# Altium PCB idro900ma.PcbDoc
Units mm, origin at the board's own origin, x right, y up, seen from the top; angles counter-clockwise.
Board outline 152.4 x 101.6 mm, 2 copper layers (Top Layer, Bottom Layer); 21 components, 17 nets, 93 pads, 11 vias.
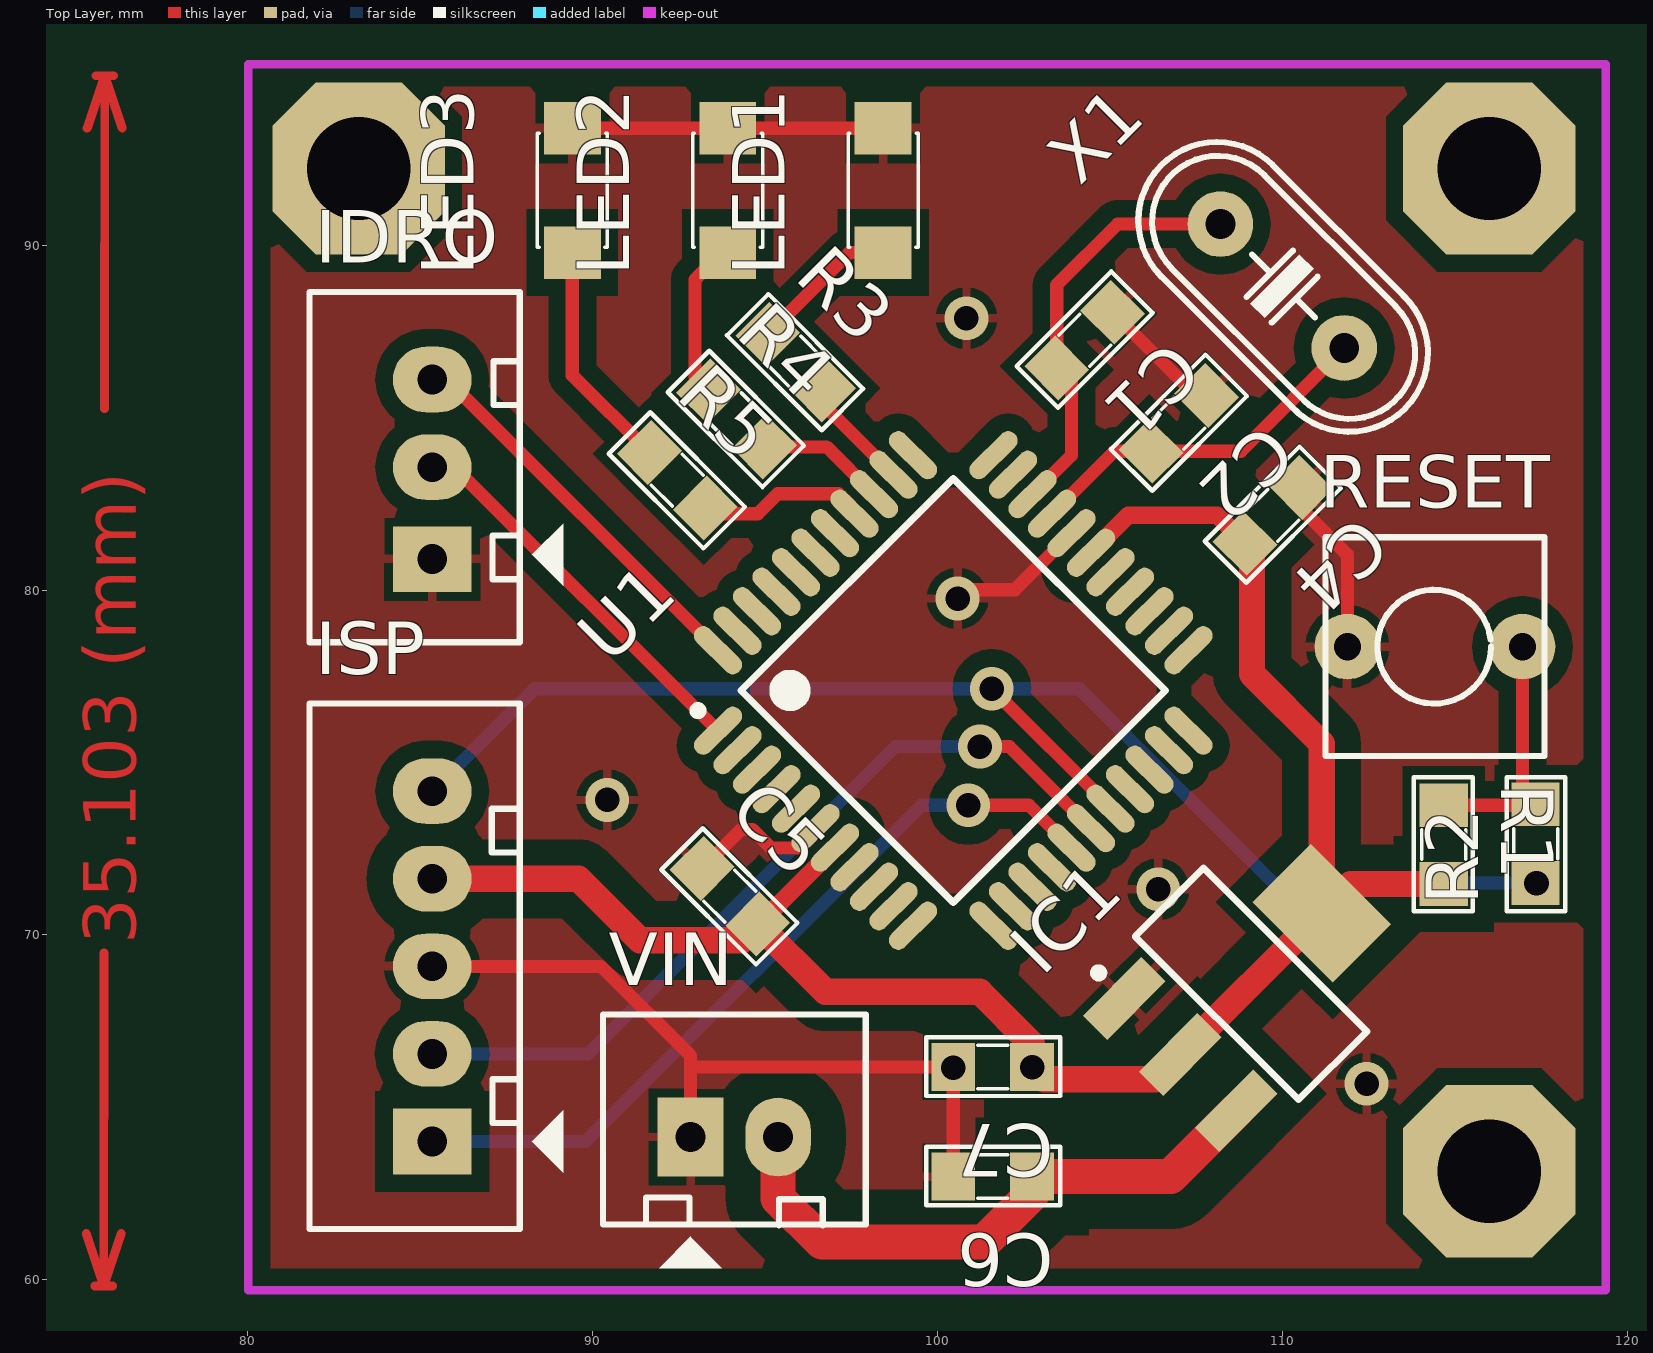
[diagram p0: Top Layer view]
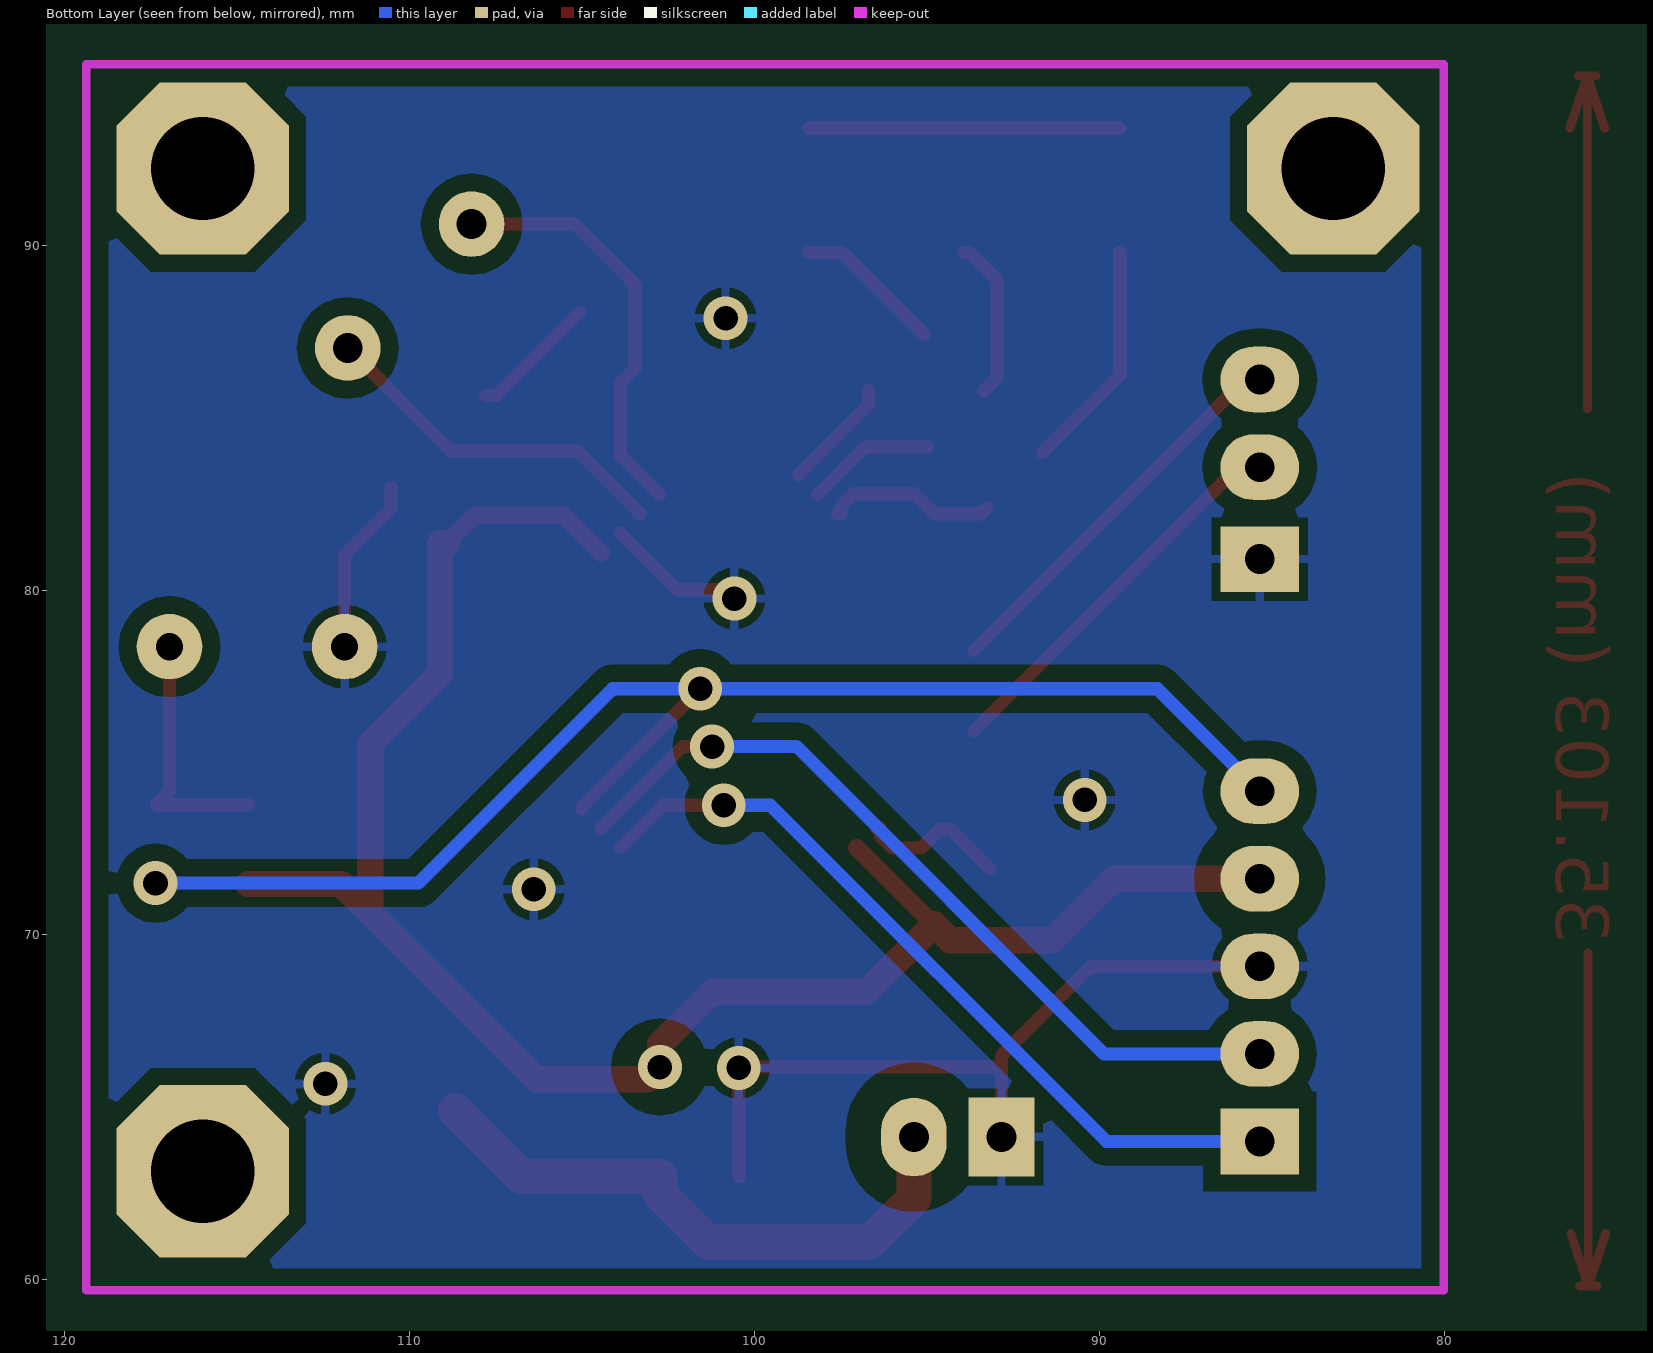
[diagram p1: Bottom Layer view, seen from below]
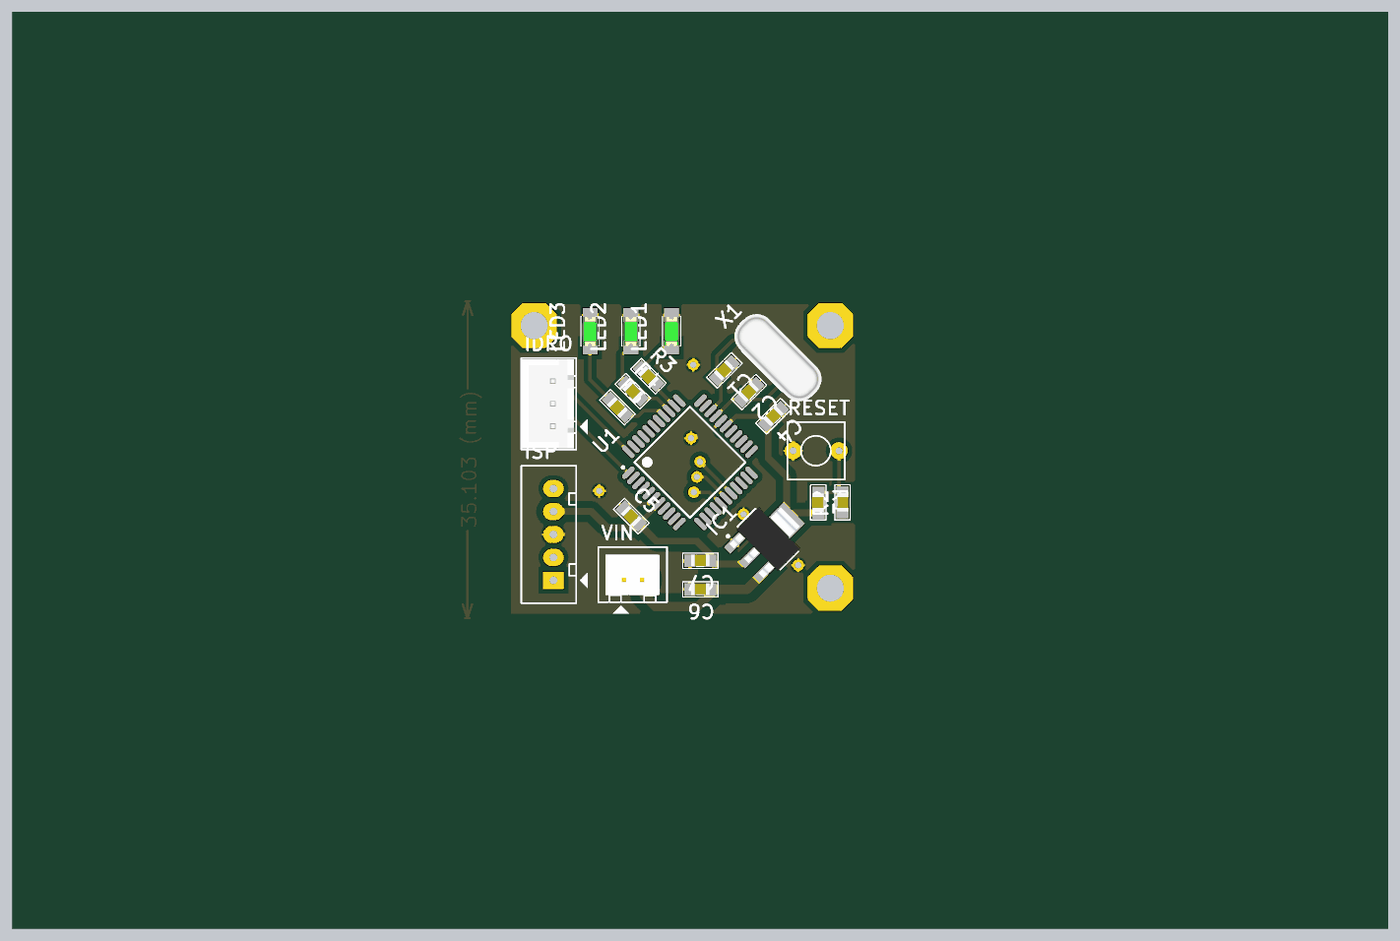
[diagram p2: 3D render of the assembled board from above, using the file's embedded part models]

## Layer stack, top to bottom
Top Solder: solder mask 0.0102, Solder Resist, Dk 3.5
Top Layer: signal copper 0.0356
Dielectric 1: dielectric 0.32, FR-4, Dk 4.8
Bottom Layer: signal copper 0.0356
Bottom Solder: solder mask 0.0102, Solder Resist, Dk 3.5

## Board outline
25.4,25.4 177.8,25.4 177.8,127 25.4,127

## Design rules (kind name [scope] priority, off if disabled: settings)
Clearance COUT [InNet('VCC-3.3V')] p1: gap=0.762
Clearance CIN [InNet('IN')] p2: gap=1.016
Clearance [All] p3: gap=0.508
PolygonConnect [All] p1: connectstyle=Relief reliefconductorwidth=0.254 reliefentries=4 polygonreliefangle="90 Angle" airgapwidth=0.254
RoutingVias [All] p1: holewidth=0.711 width=1.27 viastyle="Through Hole" minholewidth=0.711 minwidth=1.27 maxholewidth=0.711 maxwidth=1.27
SolderMaskExpansion [All] p1: expansion=0.102
UnpouredPolygon [All] p1: allowunpoured=FALSE
Width OUT [InNet('VCC-3.3V')] p1: maxlimit=0.762 minlimit=0.508 preferedwidth=0.762
Width IN [InNet('IN')] p2: maxlimit=1.016 minlimit=1.016 preferedwidth=1.016
Width [All] p3: maxlimit=0.381 minlimit=0.381 preferedwidth=0.381
29 further rules are at their usual default settings.

## Components (designator, comment, footprint, x,y, rotation, side; value= is the part's Value field where it differs from the comment)
C1 "22pF" SM-0805 104.267,87.249 r225 top
C2 "2pF" SM-0805 106.998,84.836 r225 top
C4 "103" SM-0805 109.728,82.169 r225 top
C5 "103" SM-0805 93.98,71.12 r315 top
C6 "1uF/450V" SM-0805 101.6,62.992 r180 top
C7 "1uF/450V" SM-0805 101.6,66.167 r180 top
IC1 "LM1117" SOT223-4N 109.093,68.58 r45 top
IDRO "JP3" CON3 85.344,81.026 r90 top
ISP "JP5" CON5 85.344,64.008 r90 top
LED1 "LED" LED1206-Green 98.425,89.789 r90 top
LED2 "LED" LED1206-Green 93.916,89.789 r90 top
LED3 "LED" LED1206-Green 89.408,89.789 r90 top
R1 "4.7k" SM-0805 114.681,72.619 r270 top
R2 "330" SM-0805 117.348,72.644 r90 top
R3 "220" SM-0805 95.885,86.614 r315 top
R4 "220" SM-0805 94.17,84.963 r315 top
R5 "220" SM-0805 92.456,83.185 r315 top
RESET "SW" SW2 111.887,78.359 r0 top
U1 "PIC18F46K20-I/PT" TQFP-PT44_N 100.457,77.089 r45 top
VIN "JP2" CON2 92.837,64.135 r0 top
X1 "4Mhz" XT2 110.001,88.819 r135 top

## Footprints (in the part's own frame and the unit in brackets; to place one, negate y for a bottom-side part, rotate by r counter-clockwise, add the part's x,y. Pads: shape width x height; smd on the part's side, far side on the other; paste and mask are expansions set on the pad)
CON2 [mil] "CON2"
  rect 75x90 hole 34: 1(0,0)
  oval 75x90 hole 34: 2(100,0)
  silkscreen extent -100,-150 200,140, body extent -68,-70 168,107, height 236
CON3 [mil] "CON 3"
  rect 75x90 hole 34: 1(-5,0)
  oval 75x90 hole 34: 2(100,0) 3(200,0)
  silkscreen extent -100,-150 300,140, body extent -95,-90 295,136, height 276
CON5 [mil] "CON5"
  rect 75x90 hole 34: 1(0,0)
  oval 75x90 hole 34: 2(100,0) 3(200,0) 4(300,0) 5(400,0)
  silkscreen extent -100,-150 500,140
LED1206-Green [mil]
  rect 60x65 smd: 1(0,0) 2(142,0)
  silkscreen extent 6,-40 136,40, body extent 7,-31 133,32, height 43
SM-0805 [mil] "Compoment SMD 80x50mil"
  rect 50x55 smd: 1(-45,0) 2(45,0)
  silkscreen extent -77,-34 76,33, body extent -40,-27 40,23, height 24
SOT223-4N [mm] "SOT223, 4-Leads, Body 6.5x3.5mm, Pitch 2.3mm, Lead Span 7mm, IPC Medium Density"
  rect 2.4x1 smd: 1(-2.9,2.3) 2(-2.9,0) 3(-2.9,-2.3)
  rect 2.4x3.3 smd: 4(2.9,0)
  silkscreen extent -3.02,-3.35 1.4,3.47, body extent -3.39,-3.27 3.5,3.23, height 1.72
SW2 [mil] "SW button 2pin, 250x 250 mil"
  round 75 hole 31: 1(0,0) 2(200,0)
  silkscreen extent -25,-125 225,125
TQFP-PT44_N [mm] "Thin QFP, 44-Leads, Body 10x10mm, Pitch 0.8mm, IPC Medium Density"
  oval 1.75x0.55 smd: 1(-5.65,4) 2(-5.65,3.2) 3(-5.65,2.4) 4(-5.65,1.6) 5(-5.65,0.8) 6(-5.65,0) 7(-5.65,-0.8) 8(-5.65,-1.6) 9(-5.65,-2.4) 10(-5.65,-3.2) 11(-5.65,-4) 23(5.65,-4) 24(5.65,-3.2) 25(5.65,-2.4) 26(5.65,-1.6) 27(5.65,-0.8) 28(5.65,0) 29(5.65,0.8) 30(5.65,1.6) 31(5.65,2.4) 32(5.65,3.2) 33(5.65,4)
  oval 0.55x1.75 smd: 12(-4,-5.65) 13(-3.2,-5.65) 14(-2.4,-5.65) 15(-1.6,-5.65) 16(-0.8,-5.65) 17(0,-5.65) 18(0.8,-5.65) 19(1.6,-5.65) 20(2.4,-5.65) 21(3.2,-5.65) 22(4,-5.65) 34(4,5.65) 35(3.2,5.65) 36(2.4,5.65) 37(1.6,5.65) 38(0.8,5.65) 39(0,5.65) 40(-0.8,5.65) 41(-1.6,5.65) 42(-2.4,5.65) 43(-3.2,5.65) 44(-4,5.65)
  silkscreen extent -5.77,-4.35 4.35,4.95, body extent -5,-5 5,5, height 1.2
XT2 [mil] "Footpin for Crystal 2 pin"
  round 75 hole 34: 1(-100,0) 2(100,0)
  silkscreen extent -198,-90 195,90, body extent -233,-93 213,90, height 138

## Part data
C1 C2 C4 C5: library part CM, "Cap SMD"
C6 C7: library part CP8, "Cap 4700uF/50V"
IC1: "3v3"
IDRO: library part Con3, "Connector 3"
ISP: library part Con5, "Connector 5"
LED1 LED2 LED3: "LED Single colour Green and Red"
R1 R2 R3 R4 R5: library part R, "Resistor 1/4W"
RESET: library part SW2, "Switch button 2 pin"
U1: "Flash Microcontroller with 10-Bit A/D and nanoWatt Technology, 32K Flash, 44-Pin TQFP, Industrial Temperature Range"
VIN: library part Con2, "Connector 2"
X1: library part XT2, "Crystal For all Crystal 2pin."

## Free pads (board coordinates)
  oct 5x5 hole 3: 0(83.21,92.227) 0(116.002,63.144) 0(116.002,92.227)

## Via types
v1: diameter 1.27, hole 0.711, Top Layer to Bottom Layer, 11 vias

## Nets (pads, with @x,y where several pads share a name; then routed paths per layer and width w, separated by ;. In a path a pad name is that pad's centre, name@x,y a point inside that pad or via, vN(x,y) a via of type N, cw(c..) or ccw(c..) an arc to the next point about the centre after c; other vN are vias at no path point)
GND: C1.1 C2.1 C4.1 C5.1 C6.2 C7.2 IC1.1 IDRO.1 ISP.3 LED1.2 LED2.2 LED3.2 RESET.1 U1.6 U1.29 VIN.1 | length 48.1
  Top Layer w0.381: ISP.3 90.24,69.088 92.837,66.491 92.837,66.167 ; LED3.2 LED2.2 LED1.2 ; VIN.1 92.837,66.167 ; C5.1 94.305,73.062 94.628,73.062 95.174,72.516 95.998,72.516 96.348,72.866 96.348,73.094 U1.6 ; C6.2 C7.2 92.837,66.167 ; v1(100.584,79.756) 100.838,80.01 102.247,80.01 U1.29 ; C1.1 107.488,85.644 C2.1 ; C4.1 110.536,82.377 111.887,81.026 RESET.1
  other v1: 112.446,65.684 100.457,66.142 106.401,71.323 90.424,73.914 100.838,87.884
IN: C6.1 IC1.3 VIN.2 | length 17.5
  Top Layer w1.016: VIN.2 95.377,62.357 96.647,61.087 101.346,61.087 102.743,62.484 C6.1 106.758,62.992 IC1.3
LED1: R3.2 U1.35 | length 3.3
  Top Layer w0.381: R3.2 96.693,85.378 U1.35
LED2: R4.2 U1.36 | length 3.7
  Top Layer w0.381: R4.2 96.785,84.155 U1.36
LED3: R5.2 U1.37 | length 5
  Top Layer w0.381: R5.2 93.425,82.216 94.789,82.216 95.367,82.794 97.129,82.794 97.479,82.443 97.479,82.216 U1.37
NetLED1_1: LED1.1 R3.1 | length 4.3
  Top Layer w0.381: R3.1 97.444,89.789 LED1.1
NetLED2_1: LED2.1 R4.1 | length 4.7
  Top Layer w0.381: R4.1 92.964,86.17 92.964,89.002 93.751,89.789 LED2.1
NetLED3_1: LED3.1 R5.1 | length 6.7
  Top Layer w0.381: LED3.1 89.408,86.233 R5.1
NetR1_1: R1.1 R2.2 RESET.2 | length 7.4
  Top Layer w0.381: R1.1 117.323,73.762 R2.2 116.967,74.168 RESET.2
OSC1: C1.2 U1.31 X1.2 | length 12.2
  Top Layer w0.381: U1.31 103.886,83.912 103.886,86.014 C1.2 103.459,88.854 105.22,90.615 X1.2
OSC2: C2.2 U1.30 X1.1 | length 10.5
  Top Layer w0.381: U1.30 105.133,84.028 C2.2 108.802,84.028 X1.1
PGC: ISP.1 U1.16 | length 23.1
  Top Layer w0.381: v1(100.889,73.762) 102.653,73.762 U1.16
  Bottom Layer w0.381: ISP.1 89.789,64.008 99.543,73.762 v1(100.889,73.762)
PGD: ISP.2 U1.17 | length 24.3
  Top Layer w0.381: v1@101.321,75.133 101.092,75.362 101.092,75.463 v1(101.232,75.463) 102.083,75.463 U1.17
  Bottom Layer w0.381: ISP.2 89.865,66.548 98.781,75.463 v1(101.232,75.463)
RXD: IDRO.2 U1.1 | length 11.5
  Top Layer w0.381: IDRO.2 85.99,83.566 U1.1
TXD: IDRO.3 U1.44 | length 11.5
  Top Layer w0.381: IDRO.3 85.783,86.106 U1.44
VCC-3.3V: C4.2 C5.2 C7.1 IC1.2 IC1.4 ISP.4 R1.2 U1.7 U1.28 | length 55.1
  Top Layer w0.508: C5.2 94.811,70.312 U1.7 ; U1.28 105.537,82.169 108.112,82.169 C4.2
  Top Layer w0.762: ISP.4 89.586,71.628 91.372,69.842 94.319,69.842 C5.2 96.749,68.351 101.223,68.351 102.743,66.831 v1(102.743,66.167) 103.099,65.811 106.324,65.811 IC1.2 IC1.4 ; C4.2 109.123,81.361 109.123,77.567 111.144,75.546 IC1.4 ; R1.2 111.989,71.476 IC1.4
VPP: ISP.5 R2.1 U1.18 | length 40.5
  Top Layer w0.381: v1@101.575,77.103 v1(101.575,77.14) 105.018,73.697 U1.18
  Bottom Layer w0.381: ISP.5 88.316,77.14 v1(101.575,77.14) 104.115,77.14 109.753,71.501 v1(117.373,71.501)
pads on no net: U1.2 U1.3 U1.4 U1.5 U1.8 U1.9 U1.10 U1.11 U1.12 U1.13 U1.14 U1.15 U1.19 U1.20 U1.21 U1.22 U1.23 U1.24 U1.25 U1.26 U1.27 U1.32 U1.33 U1.34 U1.38 U1.39 U1.40 U1.41 U1.42 U1.43
copper on no net: | length 26.8
  Top Layer w0.254: 75.312,61.341 75.819,59.817 ; 75.335,93.396 75.844,94.92 ; 75.565,59.817 76.073,59.817 ; 75.59,94.92 76.098,94.92 ; 75.826,69.471 75.819,59.817 ; 75.837,85.265 75.844,94.92 ; 76.328,61.341 75.819,59.817 ; 76.351,93.395 75.844,94.92

## Polygon pours and split planes (outlines as drawn)
GND on Bottom Layer "Top Layer-No Net" (solid, remove dead copper, pour order 22): 119.38,94.971 119.278,95.072 80.01,95.072 80.01,59.69 119.38,59.69
GND on Top Layer "Top Layer-No Net" (solid, remove dead copper, pour order 24): 80.01,95.25 80.01,59.817 80.137,59.69 119.38,59.69 119.38,95.25

## Keep-outs
Keep-Out Layer:
  lines w0.254: 80.01,59.69 119.38,59.69 119.38,95.25 80.01,95.25 80.01,59.69

## Other copper
Top Layer:
  text "35.103 (mm)" at 76.74,69.725 h1.52 r89.96